# EAGLE board L1-Left (EAGLE 7.2.0)
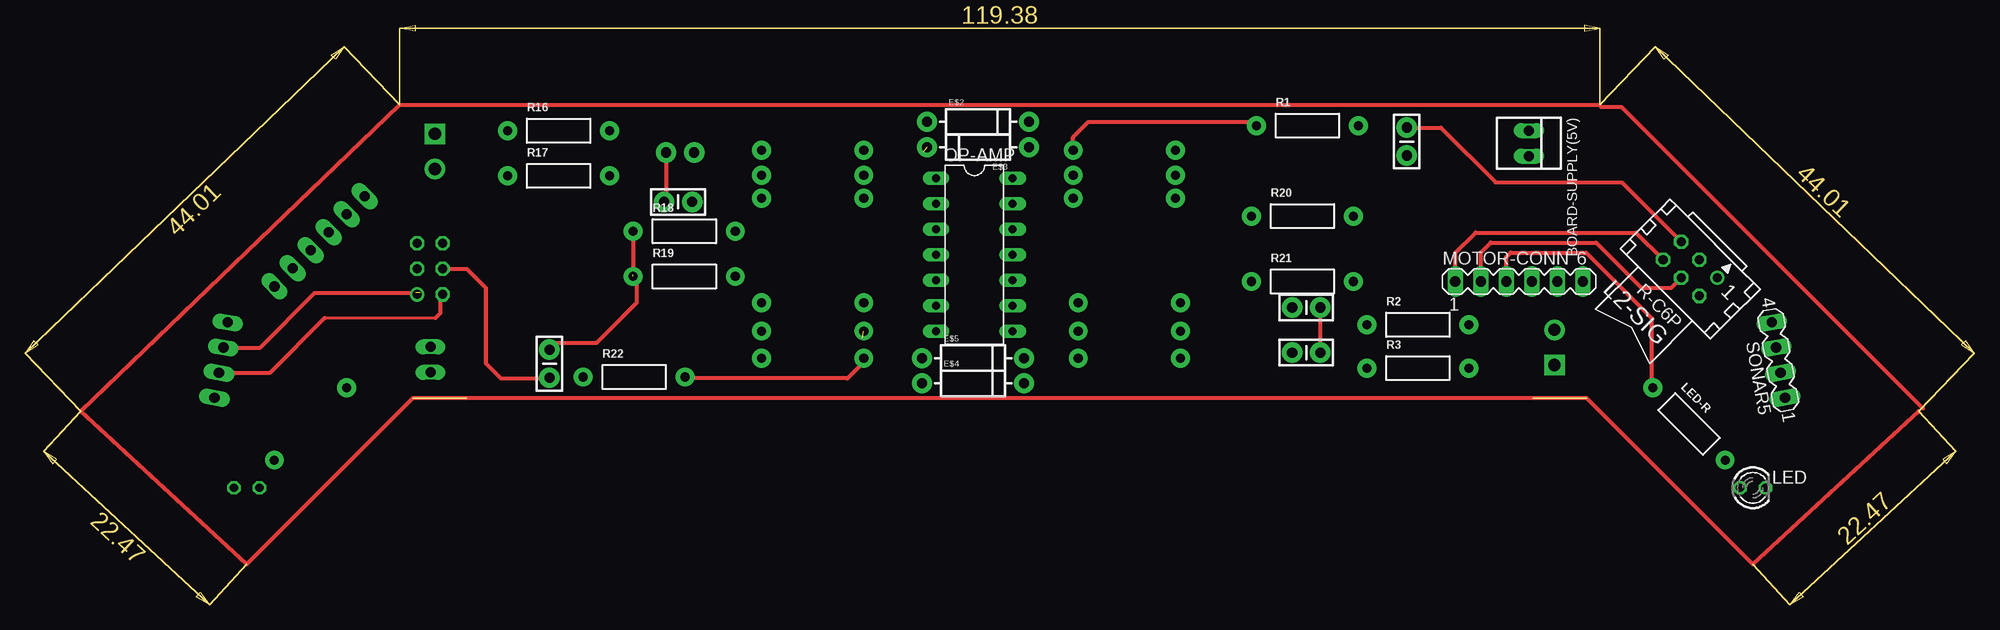
[diagram p0: board, top side]
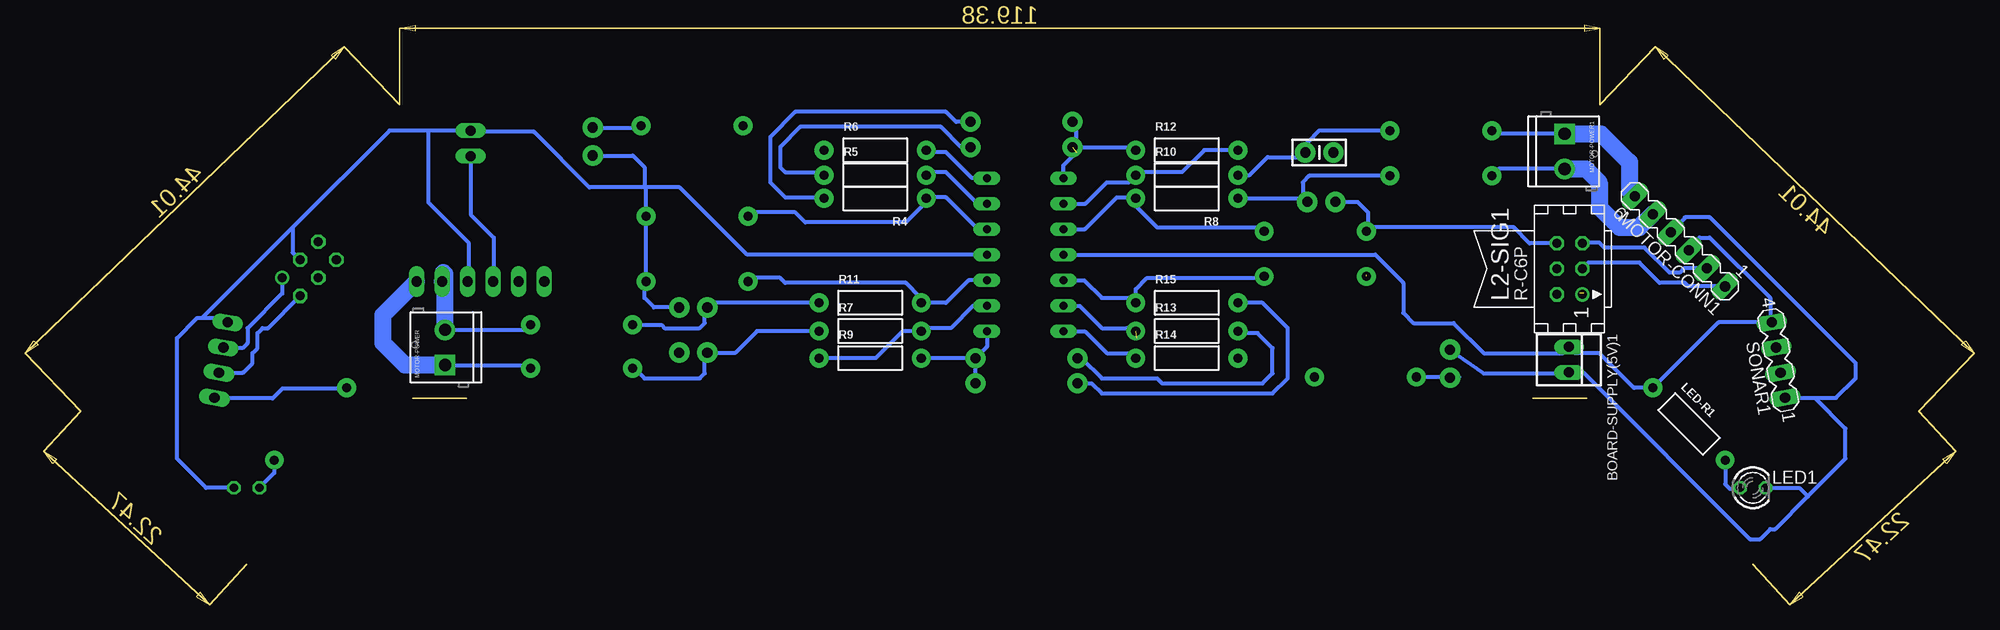
[diagram p1: board, bottom side, seen from below]

Size 193.95 x 57.65 mm. Coordinates in mm from the lower left corner, seen from the top.
Copper layers (1*16): Top 0.035mm / dielectric 1.5mm / Bottom 0.035mm
Design rules "default": minimum track width 10mil, minimum drill 24mil, track to track 8mil, track to pad 8mil, pad to pad 8mil, via to via 8mil, smd to smd 8mil, copper to edge 40mil, drill to drill 8mil, minimum pad ring 10mil, minimum via ring 8mil, stop-mask expansion 4mil, vias tented up to drill 0mil, thermal gap 10mil

## Footprints (pad centres in the part's own frame; a part is rotated, then mirrored left to right if it is on the bottom)
22-23-2021 = drill 1 long: 1 -1.27,0; 2 1.27,0
CAP-PTH-SMALL-KIT = drill 1.016 pad 2.032: 1 -1.397,0; 2 1.397,0
DIODE-1N4001 = drill 1 pad 1.981: A -5.08,0; C 5.08,0
CON06 = drill 0.914: 1 -2.54,-1.27 | drill 0.914 octagon: 2 -2.54,1.27; 3 0,-1.27; 4 0,1.27; 5 2.54,-1.27; 6 2.54,1.27
LED3MM = drill 0.813 octagon: A -1.27,0; K 1.27,0
AXIAL-0.4 = drill 0.9 pad 1.88: P$1 -5.08,0; P$2 5.08,0
MA06-1 = drill 1.016 long: 1 -6.35,0; 2 -3.81,0; 3 -1.27,0; 4 1.27,0; 5 3.81,0; 6 6.35,0
SCREWTERMINAL-3.5MM-2 = drill 1.2 pad 2.032 square: 1 0,0 | drill 1.2 pad 2.032: 2 3.5,0
DIL14 = drill 0.813 long: 1 -7.62,-3.81; 2 -5.08,-3.81; 3 -2.54,-3.81; 4 0,-3.81; 5 2.54,-3.81; 6 5.08,-3.81; 7 7.62,-3.81; 8 7.62,3.81; 9 5.08,3.81; 10 2.54,3.81; 11 0,3.81; 12 -2.54,3.81; 13 -5.08,3.81; 14 -7.62,3.81
MA04-1 = drill 1.016 long: 1 -3.81,0; 2 -1.27,0; 3 1.27,0; 4 3.81,0

## Placement (x,y rotation side)
BOARD-SUPPLY(5V)  [22-23-2021]  149.61,45.88 270 top
BOARD-SUPPLY(5V)1  [22-23-2021]  40.33,24.38 270 bottom
C1  [CAP-PTH-SMALL-KIT]  137.47,46.07 90 top
C2  [CAP-PTH-SMALL-KIT]  65.17,44.97 0 bottom
C3  [CAP-PTH-SMALL-KIT]  64.97,40.07 0 top
C4  [CAP-PTH-SMALL-KIT]  127.47,29.57 0 top
C5  [CAP-PTH-SMALL-KIT]  127.47,25.07 0 top
C6  [CAP-PTH-SMALL-KIT]  52.17,23.97 270 top
E$2  [DIODE-1N4001]  94.82,48.02 0 top
E$3  [DIODE-1N4001]  94.82,45.52 180 top
E$4  [DIODE-1N4001]  94.32,22.02 0 top
E$5  [DIODE-1N4001]  94.32,24.52 0 top
L2-SIG  [CON06]  165.67,33.41 135 top
L2-SIG1  [CON06]  40.27,33.41 90 bottom
LED  [LED3MM]  171.9,11.63 0 top
LED1  [LED3MM]  22.04,11.63 0 bottom
LED-R  [AXIAL-0.4]  165.55,17.98 315 top
LED-R1  [AXIAL-0.4]  28.39,17.98 315 bottom
MOTOR-CONN  [MA06-1]  148.64,32.15 0 top
MOTOR-CONN1  [MA06-1]  29.3,36.15 135 bottom
MOTOR-POWER  [SCREWTERMINAL-3.5MM-2]  152.17,23.84 90 bottom
MOTOR-POWER1  [SCREWTERMINAL-3.5MM-2]  40.77,46.84 270 bottom
OP-AMP  [DIL14]  94.44,34.81 270 top
R1  [AXIAL-0.4]  127.58,47.65 0 top
R2  [AXIAL-0.4]  138.58,27.84 0 top
R3  [AXIAL-0.4]  138.58,23.53 0 top
R4  [AXIAL-0.4]  109.36,40.41 180 bottom
R5  [AXIAL-0.4]  109.36,42.72 0 bottom
R6  [AXIAL-0.4]  109.36,45.22 0 bottom
R7  [AXIAL-0.4]  109.86,27.22 0 bottom
R8  [AXIAL-0.4]  78.36,40.41 180 bottom
R9  [AXIAL-0.4]  109.86,24.53 0 bottom
R10  [AXIAL-0.4]  78.36,42.72 0 bottom
R11  [AXIAL-0.4]  109.86,30.03 0 bottom
R12  [AXIAL-0.4]  78.36,45.22 0 bottom
R13  [AXIAL-0.4]  78.36,27.22 0 bottom
R14  [AXIAL-0.4]  78.36,24.53 0 bottom
R15  [AXIAL-0.4]  78.36,30.03 0 bottom
R16  [AXIAL-0.4]  53.08,47.15 0 top
R17  [AXIAL-0.4]  53.08,42.65 0 top
R18  [AXIAL-0.4]  65.58,37.15 0 top
R19  [AXIAL-0.4]  65.58,32.65 0 top
R20  [AXIAL-0.4]  127.08,38.65 0 top
R21  [AXIAL-0.4]  127.08,32.15 0 top
R22  [AXIAL-0.4]  60.58,22.65 0 top
SONAR1  [MA04-1]  19.5,24.33 100 bottom
SONAR5  [MA04-1]  174.44,24.33 100 top

## Library data of the parts
BOARD-SUPPLY(5V) BOARD-SUPPLY(5V)1 = con-molex
C1-C6 LED-R LED-R1 R1-R22 = SparkFun-Passives
E$2-E$5 = SparkFun-DiscreteSemi
L2-SIG L2-SIG1 = con-harting
LED LED1 = led
MOTOR-CONN MOTOR-CONN1 SONAR1 SONAR5 = con-lstb
MOTOR-POWER MOTOR-POWER1 = SparkFun-Connectors
OP-AMP = 40xx

## Nets
S$2: E$2.A E$3.C OP-AMP.1 R12.P$1
S$3: OP-AMP.2 R10.P$1 R12.P$2
S$4: OP-AMP.3 R8.P$2 R18.P$2
S$5: OP-AMP.5 R15.P$1 R19.P$2
S$6: OP-AMP.6 R13.P$1
S$7: OP-AMP.7 R14.P$1 R22.P$2
S$8: OP-AMP.14 R1.P$1 R6.P$2
S$9: OP-AMP.13 R5.P$2
S$10: OP-AMP.12 R4.P$1 R20.P$1
S$11: OP-AMP.10 R11.P$2 R21.P$1
S$12: OP-AMP.9 R7.P$2 R9.P$1
S$13: E$4.C E$5.C OP-AMP.8 R9.P$2
S$14: C2.1 R10.P$2 R16.P$2
S$15: C3.2 R8.P$1 R17.P$2
S$16: E$3.A R5.P$1
S$17: E$2.C R4.P$2
S$18: E$4.A R15.P$2
S$19: E$5.A R13.P$2
S$20: C4.1 R2.P$1 R11.P$1
S$21: C5.1 R3.P$1 R7.P$1
S$22: MOTOR-CONN1.6 MOTOR-POWER1.1 R16.P$1
S$23: BOARD-SUPPLY(5V).1 C1.1 C4.2 C5.2 L2-SIG.3 LED.K MOTOR-CONN.4 OP-AMP.11 R20.P$2 R21.P$2 SONAR5.4
S$24: BOARD-SUPPLY(5V)1.2 LED1.K MOTOR-CONN1.4 SONAR1.1
S$25: MOTOR-CONN1.5 MOTOR-POWER1.2 R17.P$1
S$26: MOTOR-CONN.6 MOTOR-POWER.1 R3.P$2
S$28: C1.2 L2-SIG.5 R1.P$2
S$29: C6.2 L2-SIG1.4 R22.P$1
S$30: BOARD-SUPPLY(5V)1.1 LED-R1.P$1 MOTOR-CONN1.3 OP-AMP.4 SONAR1.4
S$31: L2-SIG1.5 MOTOR-CONN1.2
S$32: L2-SIG1.3 MOTOR-CONN1.1
S$33: LED1.A LED-R1.P$2
S$34: BOARD-SUPPLY(5V).2 LED-R.P$1 MOTOR-CONN.3 SONAR5.1
S$35: LED-R.P$2 LED.A
S$36: MOTOR-CONN.5 MOTOR-POWER.2 R2.P$2
S$37: L2-SIG.1 SONAR5.3
S$38: L2-SIG.2 SONAR5.2
S$40: L2-SIG.4 MOTOR-CONN.2
S$41: L2-SIG.6 MOTOR-CONN.1
S$43: SONAR1.3
S$44: SONAR1.2
S$45: C2.2 C3.1 C6.1 L2-SIG1.6 R18.P$1 R19.P$1

## Tracks (layer width: path | path; a pad name or v marks a point on that pad's centre or on a via)
S$1
  Top 0.406: 156.66,49.73 37.28,49.73 5.53,19.25 22.04,4.01 38.55,20.52 155.39,20.52 171.9,4.01 188.41,19.25
S$2  (1 unrouted)
  Bottom 0.406: OP-AMP.1 90.63,43.71 89.32,45.02 89.32,47.6 E$2.A | E$3.C 83.74,45.52 R12.P$1
S$3
  Bottom 0.406: OP-AMP.2 88.45,39.89 86.32,42.02 84.14,42.02 R10.P$1 83.14,43.02 78.82,43.02 76.62,45.22 R12.P$2
S$4
  Bottom 0.406: OP-AMP.3 88.49,37.35 85.32,40.52 83.55,40.52 R8.P$2 83.44,39.64 81.32,37.52 71.03,37.52 R18.P$2
S$5
  Bottom 0.406: OP-AMP.5 88.57,32.27 86.82,30.52 83.93,30.52 R15.P$1 83.44,31.4 82.32,32.52 70.79,32.52 R19.P$2
S$6  (1 unrouted)
  Bottom 0.406: OP-AMP.6 89.03,29.73 86.82,27.52 84.32,27.52 83.32,26.52
S$7
  Top 0.406: R14.P$1 83.44,24.14 81.82,22.52 65.79,22.52 R22.P$2
  Bottom 0.406: OP-AMP.7 88.49,27.19 86.32,25.02 83.93,25.02 R14.P$1
S$8
  Top 0.406: R6.P$2 104.28,46.48 105.82,48.02 122.13,48.02 R1.P$1
  Bottom 0.406: OP-AMP.14 99.73,42.43 102.32,45.02 104.08,45.02 R6.P$2
S$9
  Bottom 0.406: OP-AMP.13 99.19,39.89 102.32,43.02 103.98,43.02 R5.P$2
S$10
  Bottom 0.406: OP-AMP.12 99.15,37.35 102.32,40.52 104.17,40.52 R4.P$1 104.28,40.06 106.32,38.02 116.32,38.02 117.32,39.02 122.32,39.02 122.32,38.97 R20.P$1
S$11
  Bottom 0.406: OP-AMP.10 100.07,32.27 102.32,30.02 104.32,30.02 104.82,29.52 104.82,29.99 R11.P$2 104.83,30.03 104.83,30.53 106.32,32.02 118.32,32.02 118.82,32.52 121.63,32.52 R21.P$1
S$12
  Bottom 0.406: OP-AMP.9 99.61,29.73 101.82,27.52 104.48,27.52 R7.P$2 106.62,27.22 109.32,24.52 R9.P$1
S$13
  Bottom 0.406: OP-AMP.8 98.25,25.67 E$5.C | E$4.C E$5.C | E$5.C R9.P$2
S$14
  Bottom 0.406: R16.P$2 65.19,47.15 66.32,46.02 66.32,45.22 C2.1 67.02,44.52 70.32,44.52 72.12,42.72 R10.P$2
S$15
  Bottom 0.406: R17.P$2 66.19,42.65 66.82,42.02 66.82,40.52 | 66.82,40.52 C3.2 | R8.P$1 66.94,40.41 66.82,40.52
S$16
  Bottom 0.406: E$3.A 100.82,45.52 102.82,47.52 116.82,47.52 118.82,45.52 118.82,43.52 118.32,43.02 114.74,43.02 R5.P$1
S$17
  Bottom 0.406: E$2.C 101.32,48.02 102.32,49.02 117.32,49.02 119.82,46.52 119.82,42.02 118.32,40.52 114.55,40.52 R4.P$2
S$18
  Bottom 0.406: E$4.A 87.82,22.02 86.82,21.02 69.82,21.02 68.32,22.52 68.32,27.52 70.82,30.02 R15.P$2
S$19
  Bottom 0.406: E$5.A 88.82,24.52 86.82,22.52 81.32,22.52 80.82,22.02 70.82,22.02 69.82,23.02 69.82,25.52 71.32,27.02 73.08,27.02 R13.P$2
S$20
  Bottom 0.406: R2.P$1 130.64,27.84 130.32,27.52 126.82,27.52 126.32,28.02 126.32,29.32 C4.1 125.62,30.03 R11.P$1
S$21
  Bottom 0.406: R3.P$1 133.33,23.53 132.32,22.52 126.82,22.52 126.32,23.02 126.32,24.82 C5.1 126.03,25.02 123.32,25.02 121.12,27.22 R7.P$1
S$22
  Bottom 0.406: MOTOR-POWER1.1 47.69,46.84 R16.P$1
  Bottom 1.676: MOTOR-POWER1.1 37.14,46.84 34.32,44.02 34.32,41.17 MOTOR-CONN1.6
S$23
  Top 0.406: C5.2 C4.2
  Bottom 0.406: C4.2 131.37,29.57 132.32,30.52 132.32,31.99 R21.P$2 R20.P$2 132.16,41.36 132.32,41.52 | OP-AMP.11 122.11,34.81 128.82,41.52 132.32,41.52 | 132.32,41.52 137.82,41.52 143.32,47.02 149.48,47.02 BOARD-SUPPLY(5V).1 | BOARD-SUPPLY(5V).1 157.69,47.15 167.32,37.52 | 167.32,37.52 167.32,35.06 | 167.32,35.06 L2-SIG.3 166.61,34.31 167.32,35.02 167.32,35.06 | 174.38,28.08 SONAR5.4 174.22,28.52 176.32,28.52 | 176.32,28.52 176.82,28.52 178.82,26.52 178.82,14.52 175.93,11.63 LED.K | 167.32,37.52 176.32,28.52 | BOARD-SUPPLY(5V).1 153.69,47.15 153.82,47.02 153.82,40.02 149.82,36.02 149.82,32.24 MOTOR-CONN.4 | C1.1 133.48,44.67 132.32,43.52 132.32,41.52
S$24
  Top 0.406: 40.42,23.02 BOARD-SUPPLY(5V)1.2
  Bottom 0.406: 18.9,20.52 SONAR1.1 | BOARD-SUPPLY(5V)1.2 38.91,23.11 22.32,6.52 21.32,6.52 20.32,7.52 19.82,7.52 16.57,10.77 | 16.57,10.77 12.82,14.52 12.82,17.52 15.82,20.52 18.82,20.52 19.32,20.02 19.32,20.09 SONAR1.1 | LED1.K 17.43,11.63 16.57,10.77 | SONAR1.1 13.76,20.58 11.82,22.52 11.82,24.02 26.32,38.52 28.82,38.52 28.82,38.42 MOTOR-CONN1.4
S$25
  Bottom 0.406: MOTOR-POWER1.2 47.31,43.34 R17.P$1
  Bottom 1.676: MOTOR-POWER1.2 38.64,43.34 37.32,42.02 37.32,39.52 35.32,37.52 33.32,37.52 MOTOR-CONN1.5
S$26
  Bottom 0.406: 143.85,23.34 R3.P$2 143.97,23.84 MOTOR-POWER.1
  Bottom 1.676: MOTOR-POWER.1 156.14,23.84 158.32,26.02 158.32,28.82 MOTOR-CONN.6
S$28
  Top 0.406: C1.2 140.88,47.47 146.32,42.02 158.86,42.02 L2-SIG.5
  Bottom 0.406: C1.2 132.85,47.47 R1.P$2
S$29
  Top 0.406: L2-SIG1.4 43.93,33.41 45.82,31.52 45.82,24.02 47.32,22.52 52.12,22.52 C6.2
  Bottom 0.406: R22.P$1 51.25,22.65 C6.2
S$30
  Bottom 0.406: OP-AMP.4 59.61,34.81 56.82,32.02 56.82,29.02 55.82,28.02 51.82,28.02 48.82,25.02 40.96,25.02 BOARD-SUPPLY(5V)1.1 39.7,25.02 37.32,25.02 33.87,21.57 LED-R1.P$1 25.47,28.08 SONAR1.4 20.32,28.24 20.32,30.52 26.32,36.52 27.32,36.52 28.4,35.44 MOTOR-CONN1.3
S$31
  Bottom 0.406: MOTOR-CONN1.2 28.89,33.45 29.32,33.02 30.32,33.02 32.82,35.52 36.82,35.52 37.32,36.02 38.93,36.02 L2-SIG1.5
S$32
  Bottom 0.406: MOTOR-CONN1.1 28.46,31.66 28.82,32.02 31.32,32.02 33.32,34.02 38.39,34.02 L2-SIG1.3
S$33
  Bottom 0.406: LED-R1.P$2 24.8,12 24.32,11.52 23.42,11.52 LED1.A
S$34
  Top 0.406: MOTOR-CONN.3 147.37,34.57 147.82,35.02 155.32,35.02 161.82,28.52 161.82,21.71 LED-R.P$1
  Bottom 0.406: 161.82,21.71 LED-R.P$1 162.01,21.52 168.32,21.52 169.32,20.52 175.05,20.52 SONAR5.1 | BOARD-SUPPLY(5V).2 149.61,38.81 147.32,36.52 147.32,32.2 MOTOR-CONN.3
S$35
  Bottom 0.406: LED-R.P$2 169.14,13.12 LED.A
S$36
  Bottom 0.406: MOTOR-POWER.2 143.5,27.34 143.32,27.52 143.34,27.52 R2.P$2
  Bottom 1.676: MOTOR-POWER.2 152.17,32.87 152.32,33.02 152.32,32.28 MOTOR-CONN.5
S$37
  Bottom 0.406: L2-SIG.1 168.37,30.97 171.82,27.52 171.82,26.02 172.32,25.52 174.16,25.52 SONAR5.3
S$38
  Bottom 0.406: SONAR5.2 172.26,23.08 171.32,24.02 171.32,25.02 170.82,25.52 170.82,27.02 170.32,27.52 169.77,27.52 L2-SIG.2
S$39
  Bottom 0.406: 40.42,23.02 48.82,23.02 52.17,25.37
S$40
  Top 0.406: MOTOR-CONN.2 144.83,35.03 145.82,36.02 156.32,36.02 160.82,31.52 163.78,31.52 L2-SIG.4
S$41
  Top 0.406: MOTOR-CONN.1 142.29,34.99 144.32,37.02 160.27,37.02 L2-SIG.6
S$42
  Top 0.406: 156.82,49.52 158.82,49.52 188.82,19.52
S$43  (1 unrouted)
  Top 0.406: SONAR1.3 23.38,25.58 28.82,31.02 39.32,31.02
S$44
  Top 0.305: 29.82,28.52 40.82,28.52
  Top 0.406: SONAR1.2 24.38,23.08 29.82,28.52 | 40.82,28.52 41.32,29.02 41.32,30.65
S$45  (1 unrouted)
  Top 0.406: C6.1 52.83,26.02 56.82,26.02 60.82,30.02 60.82,32.52 60.5,32.84 R18.P$1 | C3.1 63.78,40.27 C2.2
  Bottom 0.406: L2-SIG1.6 44.25,35.95 45.82,37.52 60.13,37.52 R18.P$1 60.32,37.33 60.32,39.02 61.37,40.07 C3.1